# Altium PCB AmphenolPowerBreakout.PcbDoc
Units mil, origin at the board's own origin, x right, y up, seen from the top; angles counter-clockwise.
Board outline 1000 x 1000 mil, 2 copper layers (Top Layer, Bottom Layer); 3 components, 6 nets, 14 pads, 4 vias.
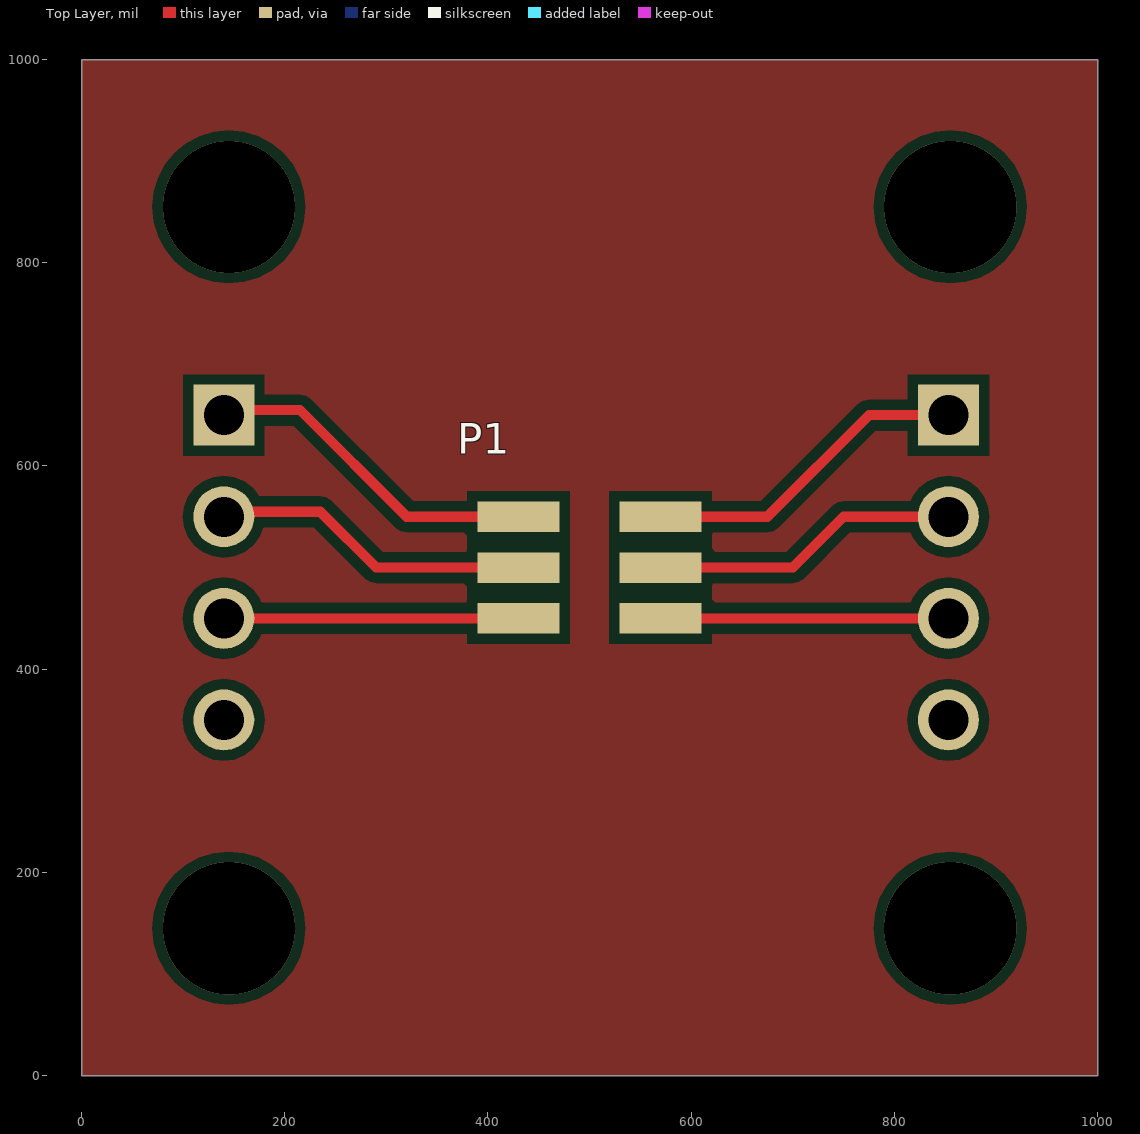
[diagram p0: Top Layer view]
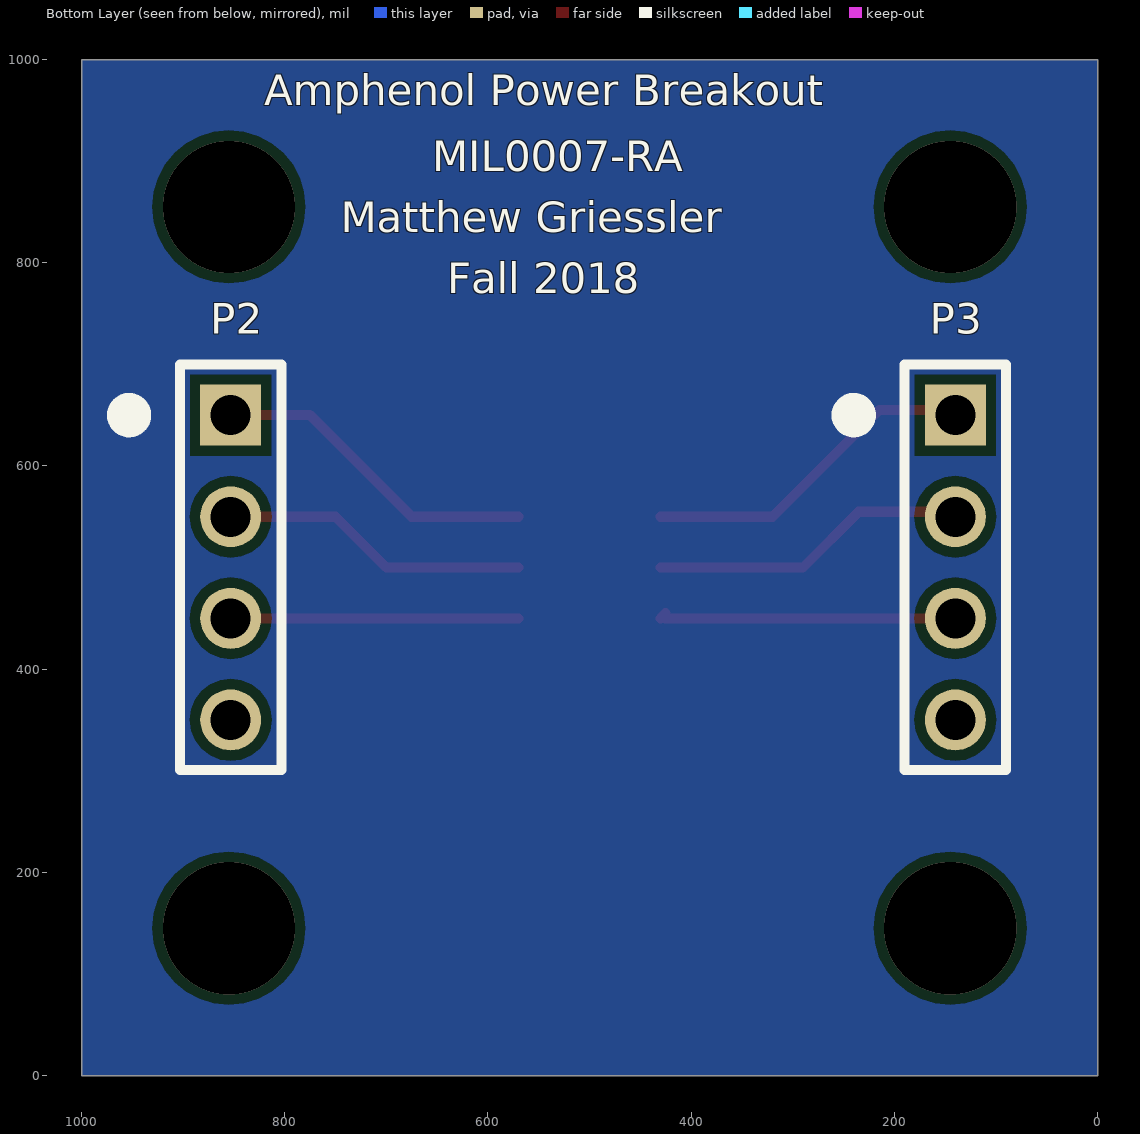
[diagram p1: Bottom Layer view, seen from below]

## Layer stack, top to bottom
Top Solder: solder mask 0.4, Solder Resist, Dk 3.5
Top Layer: signal copper 1.4
Dielectric 1: dielectric 12.6, FR-4, Dk 4.8
Bottom Layer: signal copper 1.4
Bottom Solder: solder mask 0.4, Solder Resist, Dk 3.5

## Board outline
0,0 0,1000 1000,1000 1000,0

## Design rules (kind name [scope] priority, off if disabled: settings)
Clearance [All] p1: gap=10 ignorepadtopadclearanceinfootprint=FALSE except(0: Arc-Hole Track-Hole SMDPad-Hole THPad-Hole Via-Hole Fill-Hole Poly-Hole Region-Hole Text-Hole; 5: Track-Track Track-SMDPad SMDPad-SMDPad; 7: Track-Via)
HoleSize [All] p1: absolutevalues=TRUE maxlimit=150 minlimit=10 maxpercent=80.000 minpercent=20.000
MinimumAnnularRing [All] p1: minimumring=7
MinimumSolderMaskSliver [All] p1: minsoldermaskwidth=1
PolygonConnect [All] p1: connectstyle=Relief reliefconductorwidth=10 reliefentries=4 polygonreliefangle="90 Angle" airgapwidth=10
RoutingVias [All] p1: holewidth=10 width=22 viastyle="Through Hole" minholewidth=10 minwidth=22 maxholewidth=100 maxwidth=150
SilkToSolderMaskClearance [IsPad] p1: minsilkscreentomaskgap=5 clearancetoexposedcopper=TRUE
SolderMaskExpansion [All] p1: expansion=4
Width [All] p1: maxlimit=150 minlimit=8 preferedwidth=10
27 further rules are at their usual default settings.

## Components (designator, comment, footprint, x,y, rotation, side; value= is the part's Value field where it differs from the comment)
P1 "Amphenol 20021321-00006C4LF" "Amphenol FCI 20021321-00006C4LF - duplicate" 500,500 r0 top
P2 "1x4 0.1in Header" "1x4 0.1in Header" 853.19,650 r180 bottom
P3 "1x4 0.1in Header" "1x4 0.1in Header" 140,650 r180 bottom

## Footprints (in the part's own frame and the unit in brackets; to place one, negate y for a bottom-side part, rotate by r counter-clockwise, add the part's x,y. Pads: shape width x height; smd on the part's side, far side on the other; paste and mask are expansions set on the pad)
"1x4 0.1in Header" [mil]
  rect 60x60 hole 39.37: 1(0,0)
  round 60 hole 39.37: 2(0,-100) 3(0,-200) 4(0,-300)
  silkscreen extent -110,-349 50,50
"Amphenol FCI 20021321-00006C4LF - duplicate" [mm] "6 Position Receptacle Connector"
  rect 2.05x0.76 smd: 1(-1.775,1.27) 2(-1.775,0) 3(-1.775,-1.27) 4(1.775,1.27) 5(1.775,0) 6(1.775,-1.27)
  body extent -2.3,-2.11 2.2,2.16, height 4.51

## Part data
P1: library part "Amphenol FCI 20021321-00006C4LF", "6 Position Receptacle Connector 0.050\" (1.27mm) Surface Mount Gold", Manufacturer 1="Amphenol FCI", Manufacturer Part Number 1=20021321-00006C4LF, Supplier Part Number 1=609-3704-1-ND, ComponentLink1Description=Website, Supplier 1=Digi-Key

## Via types
v1: diameter 130, hole 130, Top Layer to Bottom Layer, 4 vias

## Nets (pads, with @x,y where several pads share a name; then routed paths per layer and width w, separated by ;. In a path a pad name is that pad's centre, name@x,y a point inside that pad or via, vN(x,y) a via of type N, cw(c..) or ccw(c..) an arc to the next point about the centre after c; other vN are vias at no path point)
Amph1: P1.1 P3.1 | length 328.6
  Top Layer w10: P3.1@145,655 215,655 320,550 P1.1
Amph2: P1.2 P3.2 | length 307.9
  Top Layer w10: P3.2@145,555 235,555 290,500 P1.2
Amph3: P1.3 P3.3 | length 287.2
  Top Layer w10: P3.3@145,450 P1.3@425.12,450 ; P1.3@425.12,455 P1.3
Amph4: P1.4 P2.1 | length 321.5
  Top Layer w10: P1.4 675,550 775,650 P2.1@850,650
Amph5: P1.5 P2.2 | length 300.8
  Top Layer w10: P1.5 700,500 750,550 P2.2@850,550
Amph6: P1.6 P2.3 | length 280.1
  Top Layer w10: P1.6 P2.3@850,450
pads on no net: P2.4 P3.4
copper on no net:
  other v1: 145,145 855,145 145,855 855,855

## Polygon pours and split planes (outlines as drawn)
no net on Top Layer (solid, pour order 0): 0,1000 1000,1000 1000,0 0,0
no net on Bottom Layer (solid, pour order 4): 0,0 0,1000 1000,1000 1000,0

## Silkscreen, mask and mechanical layers (free items; w line width, h text height)
Bottom Overlay:
  text "Amphenol Power Breakout" at 820,955 h30
  text "MIL0007-RA" at 655,890 h30
  text "Matthew Griessler" at 745,830 h30
  text "Fall 2018" at 640,770 h30
BO:
  the board outline again, w10